# EAGLE board HDMI_DLT (EAGLE 9.4.2)
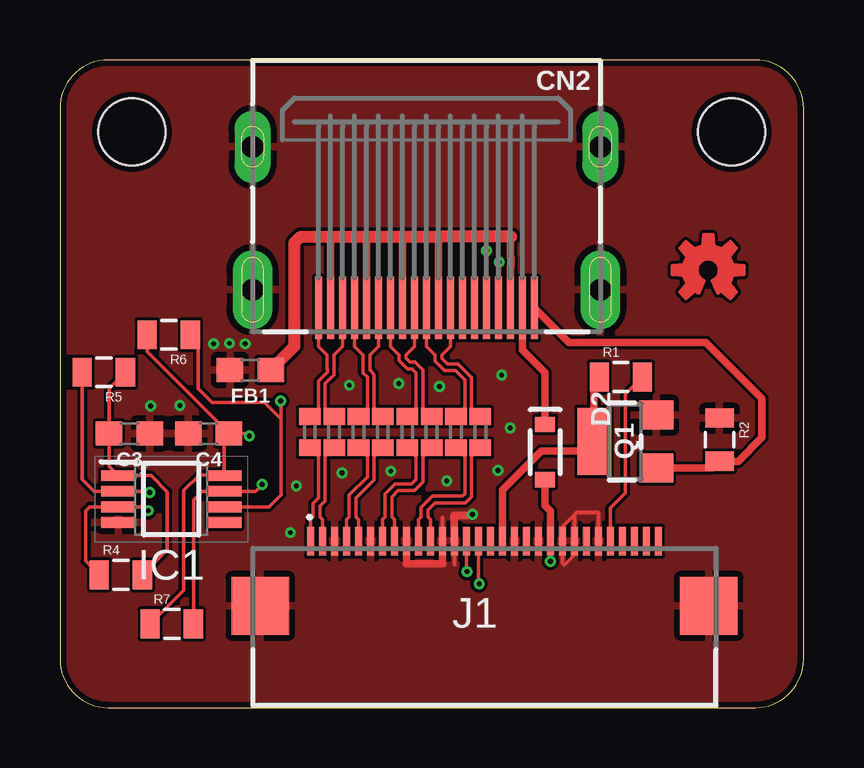
[diagram p0: board, top side]
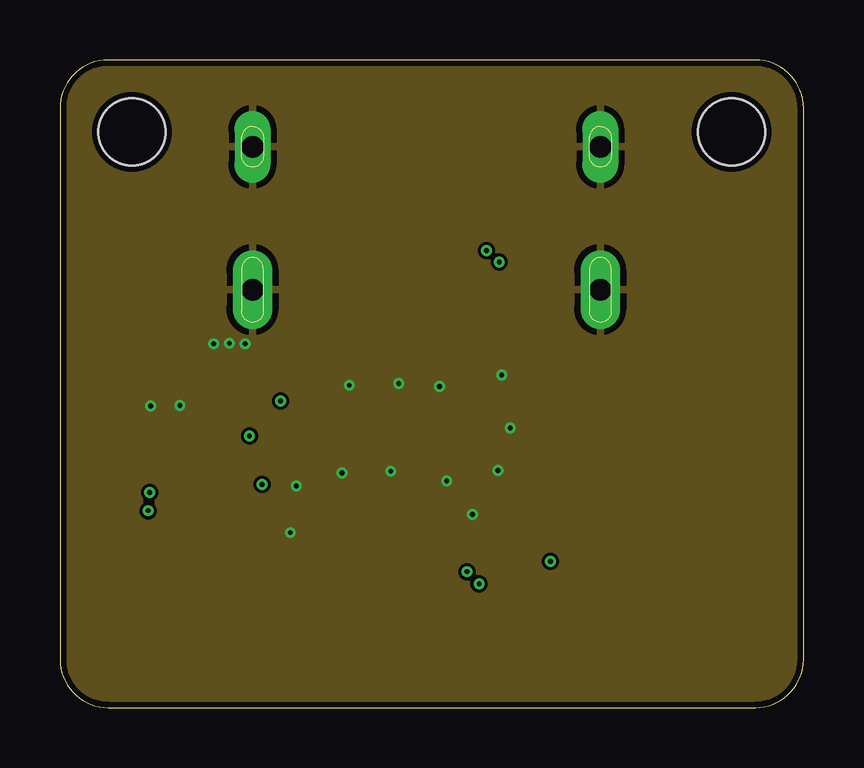
[diagram p1: board, inner layer Route2]
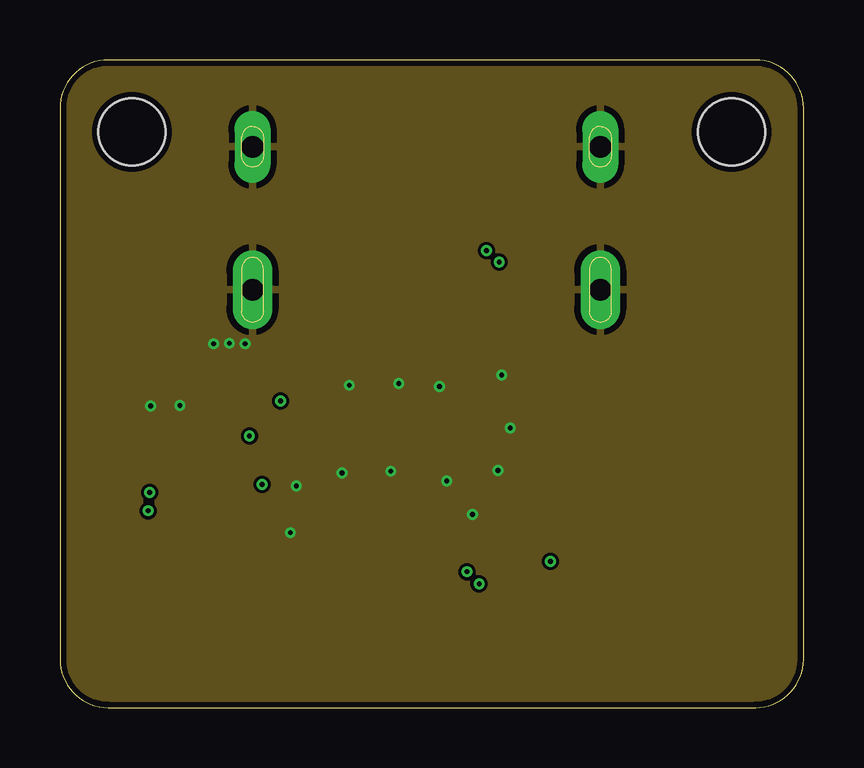
[diagram p2: board, inner layer Route15]
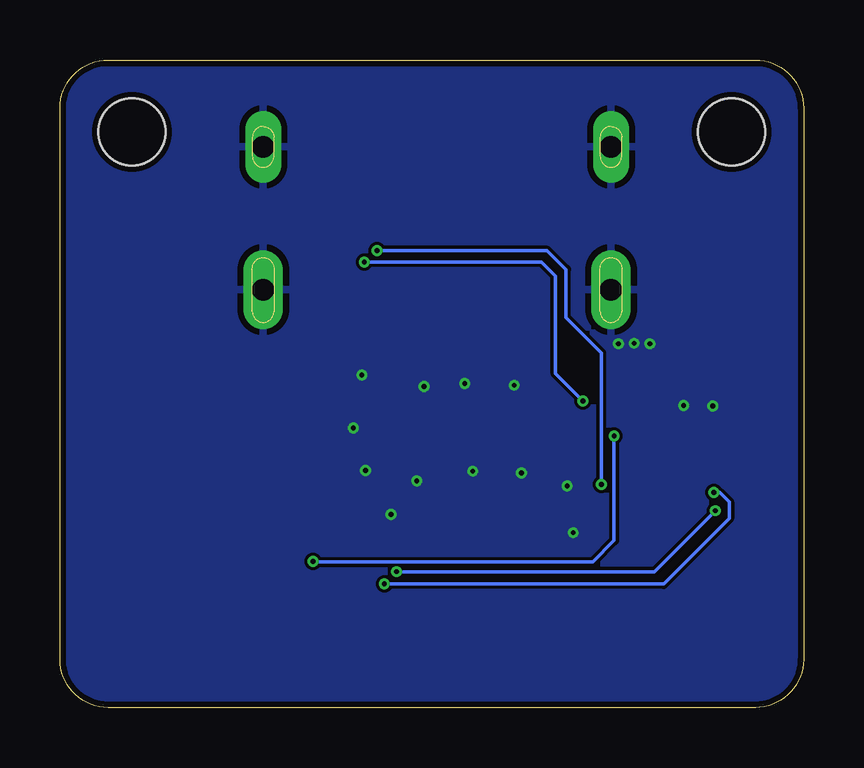
[diagram p3: board, bottom side, seen from below]

Size 31 x 27 mm. Coordinates in mm from the lower left corner, seen from the top.
Outline: 0,25 0,2 arc90 2,0 29,0 arc90 31,2 31,25 arc90 29,27 2,27 arc90 0,25
Copper layers (1+2*15+16): Top 0.035mm / dielectric 0.2mm / Route2 0.0175mm / dielectric 0.265mm / Route15 0.0175mm / dielectric 0.2mm / Bottom 0.035mm
Design rules "DLT-4Layer": minimum track width 6mil, minimum drill 0.2mm, track to track 5mil, track to pad 4mil, pad to pad 4mil, via to via 4mil, smd to smd 0mil, copper to edge 10mil, drill to drill 10mil, minimum pad ring 10mil, minimum via ring 0.125mm, stop-mask expansion 2mil, vias tented up to drill 100mil, thermal gap 10mil
Holes 2.8 mm at 3,24 28,24

## Footprints (pad centres in the part's own frame; a part is rotated, then mirrored left to right if it is on the bottom)
0603 = smd 1.1 x 1: 1 -0.85,0; 2 0.85,0
HDMI_MOLEX_47151-0001 = smd 0.3 x 2.6: 1 4.5,0; 2 4,0; 3 3.5,0; 4 3,0; 5 2.5,0; 6 2,0; 7 1.5,0; 8 1,0; 9 0.5,0; 10 0,0; 11 -0.5,0; 12 -1,0; 13 -1.5,0; 14 -2,0; 15 -2.5,0; 16 -3,0; 17 -3.5,0; 18 -4,0; 19 -4.5,0 | drill 0.9 pad 1.65 long: P$1 -7.25,-0.76; P$2 7.25,-0.76 | drill 0.9 pad 1.5 long: P$3 7.25,-6.72; P$4 -7.25,-6.72
SOD-323 = smd 0.63 x 0.83: A 1.15,0; C -1.15,0
SOP65P490X110-8N = smd 1.425 x 0.45: 1 -2.212,0.975; 2 -2.212,0.325; 3 -2.212,-0.325; 4 -2.212,-0.975; 5 2.212,-0.975; 6 2.212,-0.325; 7 2.212,0.325; 8 2.212,0.975
54132-3062 = smd 0.3 x 1.2: 1 -7.25,0.3; 2 -6.75,0.3; 3 -6.25,0.3; 4 -5.75,0.3; 5 -5.25,0.3; 6 -4.75,0.3; 7 -4.25,0.3; 8 -3.75,0.3; 9 -3.25,0.3; 10 -2.75,0.3; 11 -2.25,0.3; 12 -1.75,0.3; 13 -1.25,0.3; 14 -0.75,0.3; 15 -0.25,0.3; 16 0.25,0.3; 17 0.75,0.3; 18 1.25,0.3; 19 1.75,0.3; 20 2.25,0.3; 21 2.75,0.3; 22 3.25,0.3; 23 3.75,0.3; 24 4.25,0.3; 25 4.75,0.3; 26 5.25,0.3; 27 5.75,0.3; 28 6.25,0.3; 29 6.75,0.3; 30 7.25,0.3 | smd 2.4 x 2.4: 31 -9.35,-2.4; 32 9.35,-2.4
SOT23-W = smd 1.2 x 1.4: 1 -1.1,-1.3; 2 1.1,-1.3 | smd 2.8 x 1.4: 3 0,1.3
0805 = smd 0.8 x 1.2: 1 -0.9,0; 2 0.9,0
R0402 = smd 0.7 x 0.9: 1 -0.65,0; 2 0.65,0

## Placement (x,y rotation side)
C3  0.1uF  [0603]  2.9,11.43 180 top
C4  0.1uF  [0603]  6.2,11.43 180 top
CN2  [HDMI_MOLEX_47151-0001]  15.28,16.66 180 top
D2  1A/23V/620mV  [SOD-323]  20.22,10.65 270 top
FB1  .25/3A  [0603]  7.93,14.08 180 top
IC1  PCA9517ADP,118  [SOP65P490X110-8N]  4.64,8.69 0 top
J1  54132-3062  [54132-3062]  17.7,6.64 0 top
LOGO1  OSHW-LOGOS-COPPER  [OSHW-LOGO-S_COPPER]  27.03,18.24 0 top
Q1  [SOT23-W]  23.56,11.09 90 top
R1  4.7k  [0805]  23.38,13.78 0 top
R2  4.7k  [0805]  27.5,11.17 270 top
R3  [R0402]  16.51,11.48 270 top
R4  10k  [0805]  2.54,5.54 0 top
R5  10k  [0805]  1.83,13.98 180 top
R6  10k  [0805]  4.54,15.54 180 top
R7  10k  [0805]  4.66,3.49 0 top
R8  [R0402]  17.53,11.48 270 top
R9  [R0402]  14.48,11.48 270 top
R10  [R0402]  15.49,11.48 270 top
R11  [R0402]  12.45,11.48 270 top
R12  [R0402]  13.46,11.48 270 top
R13  [R0402]  10.41,11.48 270 top
R14  [R0402]  11.43,11.48 270 top

## Library data of the parts
C3 C4 = SparkFun-Capacitors; PROD_ID: CAP-00867
CN2 Q1 = microbuilder
D2 = SparkFun-DiscreteSemi; PROD_ID: DIO-11623
FB1 = SparkFun-Coils; PROD_ID: NDUC-13805
IC1 = SamacSys_Parts; DESCRIPTION: PCA9517ADP,118, Bus Repeater I2C, 8-Pin TSSOP; HEIGHT: 1.1mm; MANUFACTURER_NAME: Nexperia; MANUFACTURER_PART_NUMBER: PCA9517ADP,118; MOUSER_PART_NUMBER: 771-PCA9517ADP118; MOUSER_PRICE-STOCK: https://www.mouser.com/Search/Refine.aspx?Keyword=771-PCA9517ADP118
J1 = 54132-3062; DESCRIPTION: Connector 0.5mm, FFC/FPC, SMT,r/a,30w,Au Molex FFC/FPC SMT Series 0.5mm Pitch 30 Way Right Angle SMT Female FPC Connector, ZIF Bottom Contact; HEIGHT: mm; MANUFACTURER_NAME: Molex; MANUFACTURER_PART_NUMBER: 54132-3062; MOUSER_PART_NUMBER: 538-54132-3062; MOUSER_PRICE-STOCK: https://www.mouser.com/Search/Refine.aspx?Keyword=538-54132-3062
LOGO1 = SparkFun-Aesthetics
R1 R2 R4-R7 = SparkFun-Passives
R3 R8-R14 = resistor

## Nets
1.8V: J1.26 R1.2
3.3V: C3.2 IC1.1 R4.2 R5.1
DP_PWR_3V3: J1.24
GND: C3.1 C4.2 CN2.P$1 CN2.P$2 CN2.P$3 CN2.P$4 FB1.2 IC1.4 J1.3 J1.6 J1.9 J1.12 J1.13 J1.18 J1.20 J1.22 J1.23 J1.25 J1.31 J1.32 Q1.2 R2.1
HDMI_5V_DIODE1: CN2.18 D2.C
HDMI_CEC: J1.16
HDMI_HEC_N: J1.19
HDMI_HPD: J1.17 Q1.3 R1.1
HDMI_HPD_IN: CN2.19 Q1.1 R2.2
HDMI_PWR_5V: C4.1 D2.A IC1.8 J1.21 R6.2 R7.1
HDMI_SCL: IC1.2 J1.15 R5.2
HDMI_SCL_5V: CN2.15 IC1.7 R7.2
HDMI_SDA: IC1.3 J1.14 R4.1
HDMI_SDA_5V: CN2.16 IC1.6 R6.1
HDMI_SHIELD: CN2.2 CN2.5 CN2.8 CN2.11 CN2.17 FB1.1
TMDS_CLK_C1_N: CN2.12 R8.1
TMDS_CLK_C1_P: CN2.10 R3.1
TMDS_CLK_C_N: J1.11 R8.2
TMDS_CLK_C_P: J1.10 R3.2
TMDS_D0_C1_N: CN2.9 R10.1
TMDS_D0_C1_P: CN2.7 R9.1
TMDS_D0_C_N: J1.8 R10.2
TMDS_D0_C_P: J1.7 R9.2
TMDS_D1_C1_N: CN2.6 R12.1
TMDS_D1_C1_P: CN2.4 R11.1
TMDS_D1_C_N: J1.5 R12.2
TMDS_D1_C_P: J1.4 R11.2
TMDS_D2_C1_N: CN2.3 R14.1
TMDS_D2_C1_P: CN2.1 R13.1
TMDS_D2_C_N: J1.2 R14.2
TMDS_D2_C_P: J1.1 R13.2

## Tracks (layer width: path | path; a pad name or v marks a point on that pad's centre or on a via)
1.8V
  Top 0.152: R1.2 23.57,13.07 23.57,8.94 22.95,8.32 J1.26
3.3V
  Top 0.152: R5.1 2.05,13.29 C3.2 2.05,10.05 IC1.1 3.79,9.67 4.47,8.99 4.47,6.57 R4.2
GND  (via drill 0.2)
  Top 0.152: 21.45,8.04 J1.23 21.45,6.36 21.03,5.94 20.95,6.03 J1.22 20.95,7.54 21.45,8.04 | J1.25 22.45,8.13 21.54,8.13 21.45,8.04 | J1.13 16.45,5.96 16.46,5.94 | J1.12 15.95,7.92
  Top 0.305: J1.12 15.95,6.04 15.95,5.99 14.45,5.99 J1.9 | v17.2,8.05 17.2,8 16.43,8 16.43,6.94 J1.13
  other vias: 5,12.6 3.78,12.57 7.06,15.19 6.4,15.16 7.72,15.16 12.06,13.44 14.12,13.51 15.82,13.39 16.13,9.45 13.79,9.86 11.76,9.78 9.6,7.29 9.86,9.25 18.26,9.88 18.77,11.66 18.41,13.87
  pour Top: -2.97,29.69 -2.97,-3.12 33.02,-3.12 33.02,29.69
  pour Bottom: -1.22,27.03 -1.22,-1.12 31.55,-1.12 31.55,27.03
  pour Route15: -2.36,27.86 -2.36,-2.06 32.46,-2.06 32.46,27.86
  pour Route2: -2.77,28.4 -2.77,-3.48 33.27,-3.48 33.27,28.4
HDMI_5V_DIODE1
  Top 0.305: D2.C 20.22,13.96 19.28,14.91 CN2.18
HDMI_HPD
  Top 0.305: R1.1 22.26,13.56 Q1.3 21.86,10.69 20.07,10.69 18.45,9.07 J1.17
HDMI_HPD_IN
  Top 0.305: CN2.19 21.23,15.21 26.92,15.21 29.26,12.88 29.26,11.25 28.28,10.27 R2.2 27.22,9.99 Q1.1
HDMI_PWR_5V  (via drill 0.2)
  Top 0.152: 7,11.47 C4.1 7.8,11.43 v7.9,11.33 | 7,11.47 3.64,14.84 R6.2 | IC1.8 6.85,9.7 | 6.85,9.7 6.85,11.32 7,11.47 | R7.1 5.16,4.88 5.16,9.04 5.82,9.7 6.85,9.7 | v20.45,6.1 J1.21
  Top 0.305: J1.21 20.45,8.21 20.22,8.43 D2.A
  Bottom 0.152: v7.9,11.33 7.9,6.96 8.79,6.07 20.42,6.07 v20.45,6.1
HDMI_SCL  (via drill 0.2)
  Top 0.152: R5.2 0.93,9.51 1.42,9.02 IC1.2 3.68,9.02 v3.73,8.97 | v17.48,5.16 17.45,5.18 J1.15
  Bottom 0.152: v3.73,8.97 3.49,8.97 3.1,8.57 3.1,7.88 5.83,5.16 v17.48,5.16
HDMI_SCL_5V  (via drill 0.2)
  Top 0.152: R7.2 5.56,8.66 5.92,9.02 IC1.7 8.16,9.02 v8.43,9.3 | v17.78,19.05 CN2.15
  Bottom 0.152: v8.43,9.3 8.43,14.78 9.91,16.26 9.91,18.26 10.69,19.05 v17.78,19.05
HDMI_SDA  (via drill 0.2)
  Top 0.152: R4.1 1.07,6.11 1.07,8.2 1.23,8.37 IC1.3 3.52,8.37 v3.68,8.2 | v16.97,5.66 16.95,5.68 J1.14
  Bottom 0.152: v3.68,8.2 6.22,5.66 v16.97,5.66
HDMI_SDA_5V  (via drill 0.2)
  Top 0.152: IC1.6 8.72,8.37 9.22,8.87 9.22,12.04 | R6.1 5.77,15.21 5.77,13.31 6.35,12.72 8.53,12.72 9.22,12.04 | 9.22,12.04 9.22,12.75 v9.2,12.78 | v18.31,18.57 18.31,16.69 CN2.16
  Bottom 0.152: v9.2,12.78 10.34,13.92 10.34,17.98 10.92,18.57 v18.31,18.57
HDMI_SHIELD
  Top 0.305: CN2.2 11.28,19.61 11.3,19.63 | CN2.5 12.78,19.58 12.72,19.63 | CN2.8 14.28,19.6 14.25,19.63 | CN2.11 15.78,19.51 15.9,19.63 | 18.82,19.63 18.78,19.59 18.78,18.78 18.79,18.77 18.79,18.37 18.78,18.36 CN2.17
  Top 0.508: FB1.1 9.78,15.07 9.78,19.38 10.03,19.63 11.3,19.63 12.72,19.63 14.25,19.63 15.9,19.63 18.82,19.63
TMDS_CLK_C1_N
  Top 0.152: R8.1 17.16,12.5 17.16,13.77 16.6,14.33 16.15,14.33 15.92,14.55 15.92,14.7 16.28,15.05 CN2.12
TMDS_CLK_C1_P
  Top 0.152: R3.1 16.88,12.5 16.88,13.65 16.48,14.05 16.03,14.05 15.64,14.44 15.64,14.7 15.28,15.05 CN2.10
TMDS_CLK_C_N
  Top 0.152: J1.11 15.45,7.84 15.34,7.95 15.34,8.23 15.64,8.53 16.91,8.53 16.99,8.62 | R8.2 17.16,10.46 17.16,8.79 16.99,8.62 | 17.06,8.69 16.99,8.62
TMDS_CLK_C_P
  Top 0.152: J1.10 14.95,7.84 15.06,7.95 15.06,8.35 15.53,8.81 16.79,8.81 | R3.2 16.88,10.46 16.88,8.9 16.79,8.81 | 16.87,8.89 16.79,8.81
TMDS_D0_C1_N
  Top 0.152: R10.1 15.13,12.5 15.13,14.07 14.8,14.4 14.6,14.4 14.42,14.58 14.42,14.7 14.78,15.05 CN2.9
TMDS_D0_C1_P
  Top 0.152: R9.1 14.85,12.5 14.85,13.96 14.68,14.12 14.48,14.12 14.14,14.46 14.14,14.7 13.78,15.05 CN2.7
TMDS_D0_C_N
  Top 0.152: J1.8 13.95,7.84 13.84,7.95 13.84,8.79 14.09,9.04 14.77,9.04 15.13,9.4 15.13,10.46 R10.2
TMDS_D0_C_P
  Top 0.152: J1.7 13.45,7.84 13.56,7.95 13.56,8.9 13.97,9.32 14.66,9.32 14.85,9.51 14.85,10.46 R9.2
TMDS_D1_C1_N
  Top 0.152: R12.1 13.09,12.5 13.09,13.89 12.92,14.07 12.92,14.7 13.28,15.05 CN2.6
TMDS_D1_C1_P
  Top 0.152: R11.1 12.81,12.5 12.81,13.78 12.64,13.95 12.64,14.7 12.28,15.05 CN2.4
TMDS_D1_C_N
  Top 0.152: J1.5 12.45,7.84 12.34,7.95 12.34,8.74 13.09,9.5 13.09,10.46 R12.2
TMDS_D1_C_P
  Top 0.152: J1.4 11.95,7.84 12.06,7.95 12.06,8.86 12.81,9.61 12.81,10.46 R11.2
TMDS_D2_C1_N
  Top 0.152: R14.1 11.06,12.5 11.06,13.5 11.43,13.87 11.43,14.3 11.43,14.52 11.42,14.53 11.42,14.7 11.78,15.05 CN2.3
TMDS_D2_C1_P
  Top 0.152: R13.1 10.78,12.5 10.78,13.62 11.15,13.98 11.15,14.1 11.14,14.11 11.14,14.33 11.14,14.7 10.78,15.05 CN2.1
TMDS_D2_C_N
  Top 0.152: R14.2 11.06,10.46 11.06,8.62 10.84,8.4 | J1.2 10.95,7.84 10.84,7.95 10.84,8.32 | 10.92,8.48 10.84,8.4 | 10.84,8.4 10.84,8.32 | 10.84,8.4 10.84,8.32
TMDS_D2_C_P
  Top 0.152: R13.2 10.78,10.46 10.78,8.74 10.56,8.51 | J1.1 10.45,7.84 10.56,7.95 10.56,8.51 | 10.72,8.68 10.56,8.51

## Text on the board
tStop: eDP